# EAGLE board networkLED-v1 (EAGLE 5.07)
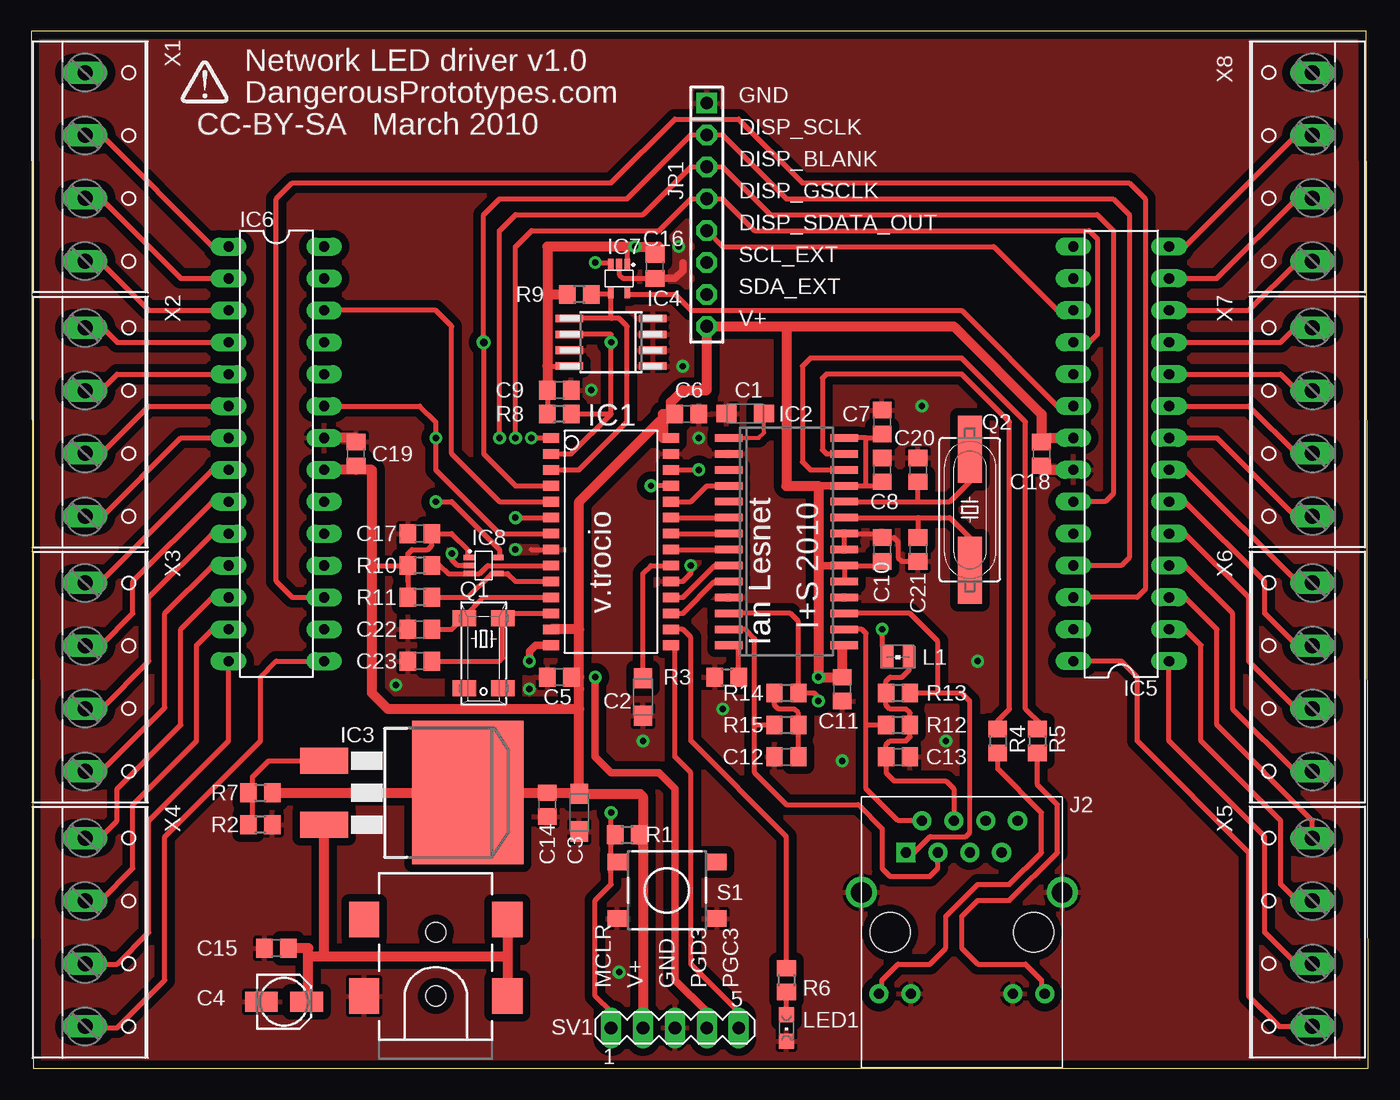
[diagram p0: board, top side]
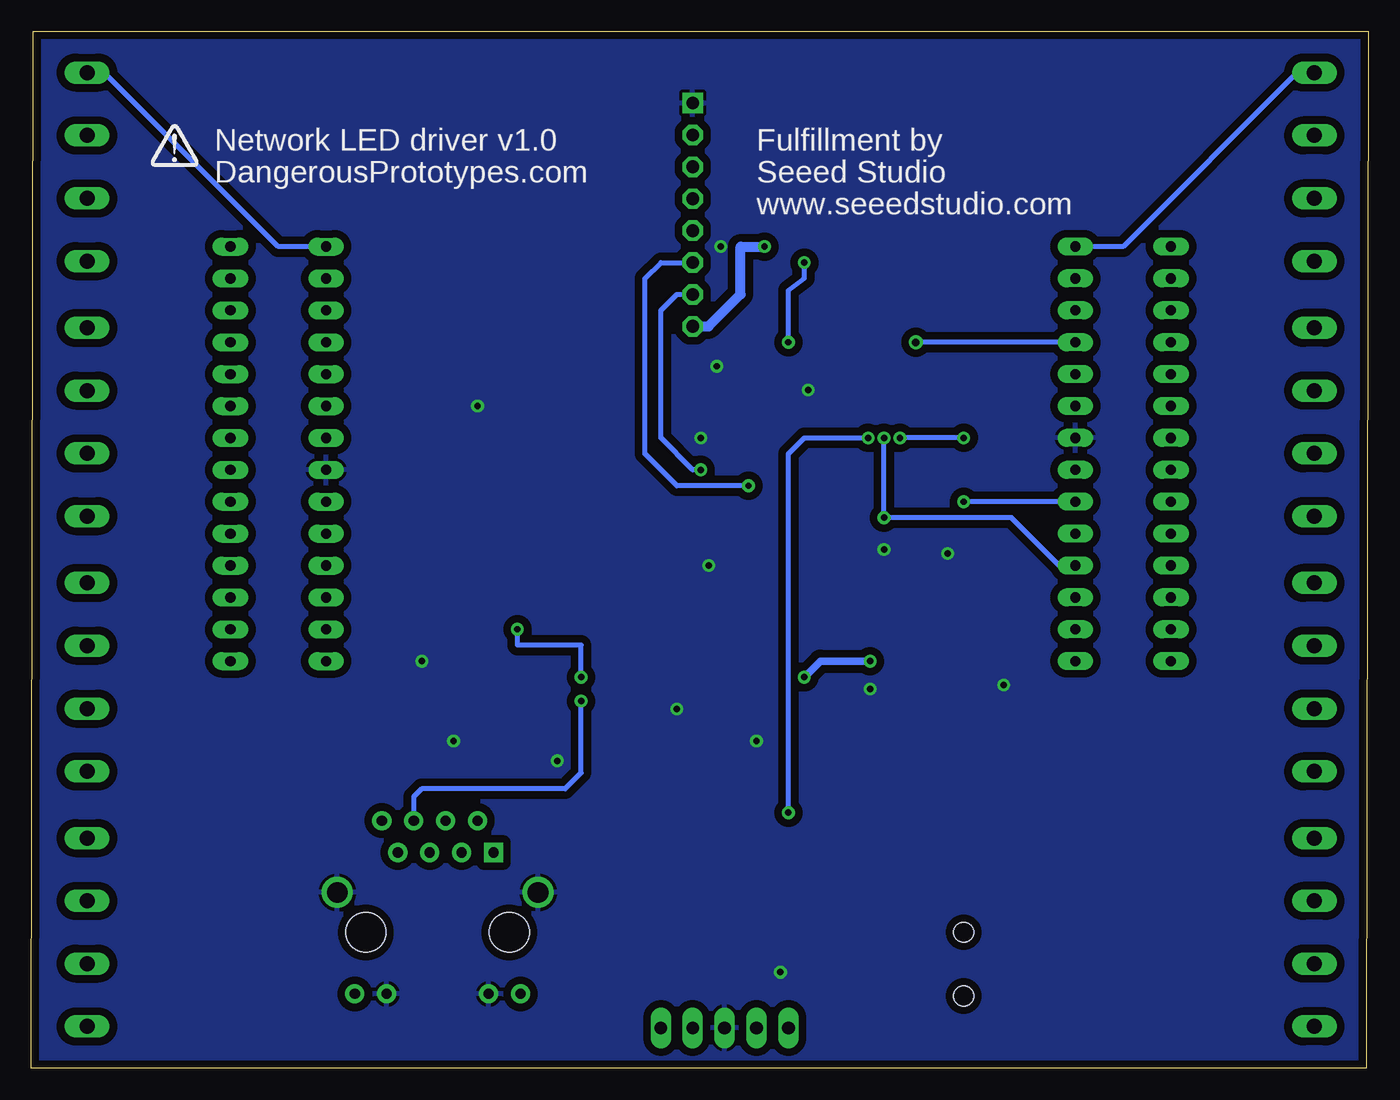
[diagram p1: board, bottom side, seen from below]

Size 106.5 x 82.59 mm. Coordinates in mm from the lower left corner, seen from the top.
Outline: 0.15,0 106.5,0 106.35,82.59 0,82.59 0.15,0
Copper layers (1*16): Top 0.035mm / dielectric 1.5mm / Bottom 0.035mm
Design rules "SparkFun": minimum track width 8mil, minimum drill 20mil, track to track 8mil, track to pad 8mil, pad to pad 8mil, via to via 8mil, smd to smd 8mil, copper to edge 10mil, drill to drill 8mil, minimum pad ring 12mil, minimum via ring 10mil, stop-mask expansion 4mil, vias tented up to drill 25mil, thermal gap 10mil

## Footprints (pad centres in the part's own frame; a part is rotated, then mirrored left to right if it is on the bottom)
SMC_A = smd 1.6 x 1.4: + -1.5,0; - 1.5,0
153CLV-0405 = smd 2.6 x 1.6: + 1.8,0; - -1.8,0
C0805 = smd 1.3 x 1.5: 1 -0.95,0; 2 0.95,0
SO28W = smd 0.762 x 1.27: 1 -8.89,-4.78; 2 -7.62,-4.78; 3 -6.35,-4.78; 4 -5.08,-4.78; 5 -3.81,-4.78; 6 -2.54,-4.78; 7 -1.27,-4.78; 8 0,-4.78; 9 1.27,-4.78; 10 2.54,-4.78; 11 3.81,-4.78; 12 5.08,-4.78; 13 6.35,-4.78; 14 7.62,-4.78; 15 7.62,4.78; 16 6.35,4.78; 17 5.08,4.78; 18 3.81,4.78; 19 2.54,4.78; 20 1.27,4.78; 21 0,4.78; 22 -1.27,4.78; 23 -2.54,4.78; 24 -3.81,4.78; 25 -5.08,4.78; 26 -6.35,4.78; 27 -7.62,4.78; 28 -8.89,4.78
SO28W' = smd 0.6 x 2.2: 1 -8.255,-4.6; 2 -6.985,-4.6; 3 -5.715,-4.6; 4 -4.445,-4.6; 5 -3.175,-4.6; 6 -1.905,-4.6; 7 -0.635,-4.6; 8 0.635,-4.6; 9 1.905,-4.6; 10 3.175,-4.6; 11 4.445,-4.6; 12 5.715,-4.6; 13 6.985,-4.6; 14 8.255,-4.6; 15 8.255,4.6; 16 6.985,4.6; 17 5.715,4.6; 18 4.445,4.6; 19 3.175,4.6; 20 1.905,4.6; 21 0.635,4.6; 22 -0.635,4.6; 23 -1.905,4.6; 24 -3.175,4.6; 25 -4.445,4.6; 26 -5.715,4.6; 27 -6.985,4.6; 28 -8.255,4.6
D2PACK = smd 2.083 x 3.81: 1 -2.54,-8.89; 3 2.54,-8.89 | smd 11.43 x 8.89: 2 0,2.54
SO-08M = smd 0.6 x 2.2: 1 -1.905,-3.33; 2 -0.635,-3.33; 3 0.635,-3.33; 4 1.905,-3.33; 5 1.905,3.33; 6 0.635,3.33; 7 -0.635,3.33; 8 -1.905,3.33
28-DIL-300 = drill 0.813 long: 1 -15.24,-3.81; 2 -12.7,-3.81; 3 -10.16,-3.81; 4 -7.62,-3.81; 5 -5.08,-3.81; 6 -2.54,-3.81; 7 0,-3.81; 8 2.54,-3.81; 9 5.08,-3.81; 10 7.62,-3.81; 11 10.16,-3.81; 12 12.7,-3.81; 13 15.24,-3.81; 14 17.78,-3.81; 15 17.78,3.81; 16 15.24,3.81; 17 12.7,3.81; 18 10.16,3.81; 19 7.62,3.81; 20 5.08,3.81; 21 2.54,3.81; 22 0,3.81; 23 -2.54,3.81; 24 -5.08,3.81; 25 -7.62,3.81; 26 -10.16,3.81; 27 -12.7,3.81; 28 -15.24,3.81
SOT23-5-LT = smd 0.45 x 0.95: P1 0.65,1.1; P2 0,1.1; P3 -0.65,1.1; P4 -0.65,-1.1; P5 0.65,-1.1
POWER_JACK_SMD = smd 2.8 x 2.4: GND 0,-5.7; P$4 6.1,-5.7; VIN0 0,5.7; VIN1 6.1,5.7 | hole 1.6: 0,0; 5.08,0
HR911105A = drill 0.813 pad 1.524 square: 1 4.445,-6.35 | drill 0.813 pad 1.524 round: 2 3.175,-8.89; 3 1.905,-6.35; 4 0.635,-8.89; 5 -0.635,-6.35; 6 -1.905,-8.89; 7 -3.175,-6.35; 8 -4.445,-8.89; 9 6.604,4.902; 10 4.064,4.902; 11 -4.064,4.902; 12 -6.604,4.902 | drill 1.651 pad 2.159 round: 13 8.001,-3.175; 14 -8.001,-3.175 | hole 3.2: 5.715,0; -5.715,0
1X08 = drill 1.016 square: 1 -8.89,0 | drill 1.016 octagon: 2 -6.35,0; 3 -3.81,0; 4 -1.27,0; 5 1.27,0; 6 3.81,0; 7 6.35,0; 8 8.89,0
WE-KI_0805_B = smd 1.02 x 1.78: 1 -0.89,0; 2 0.89,0
LED0805 = smd 1.2 x 1.2: A 0,-1.05; C 0,1.05
MM20SS = smd 1.27 x 1.88: 1 -2.794,-1.524; 2 2.794,-1.524; 3 2.794,1.524; 4 -2.794,1.524
HC49UP = smd 5.334 x 1.93: 1 -4.826,0; 2 4.826,0
R0805 = smd 1.3 x 1.5: 1 -0.95,0; 2 0.95,0
LSH43 = smd 1.55 x 1.3: 1 -3.975,2.25; 2 3.975,2.25; 3 -3.975,-2.25; 4 3.975,-2.25
MA05-1 = drill 1.016 long: 1 -5.08,0; 2 -2.54,0; 3 0,0; 4 2.54,0; 5 5.08,0
W237-4 = drill 1.194 long: 1 -7.5,-1.27; 2 -2.5,-1.27; 3 2.5,-1.27; 4 7.5,-1.27

## Placement (x,y rotation side)
C1  10uF  [SMC_A]  56.87,52.15 180 top
C2  10uF  [SMC_A]  48.73,29.57 270 top
C3  10uF  [SMC_A]  43.65,20.37 270 top
C4  10uF  [153CLV-0405]  20.13,5.3 0 top
C5  0.1uF  [C0805]  42.06,31.16 180 top
C6  0.1uF  [C0805]  52.22,52.12 0 top
C7  0.1uF  [C0805]  67.78,51.48 90 top
C8  0.1uF  [C0805]  67.78,47.67 90 top
C9  0.1uF  [C0805]  42.06,54.02 0 top
C10  0.1uF  [C0805]  67.78,41.32 90 top
C11  0.1uF  [C0805]  64.61,30.21 270 top
C12  0.1uF  [C0805]  60.16,24.81 0 top
C13  0.1uF  [C0805]  69.05,24.81 0 top
C14  0.1uF  [C0805]  41.11,21 270 top
C15  0.1uF  [C0805]  19.52,9.57 180 top
C16  0.1uF  [C0805]  49.68,63.86 270 top
C17  0.1uF  [C0805]  30.95,42.59 180 top
C18  0.1uF  [C0805]  80.48,48.94 270 top
C19  0.1uF  [C0805]  25.87,48.94 90 top
C20  27pf  [C0805]  70.64,47.67 90 top
C21  27pf  [C0805]  70.64,41.32 270 top
C22  27pf  [C0805]  30.95,34.97 180 top
C23  27pf  [C0805]  30.95,32.43 180 top
IC1  [SO28W]  46.19,41.32 270 top
IC2  ENC28J60-SO  [SO28W']  60.16,41.96 270 top
IC3  LM317BD2T  [D2PACK]  32.22,21.95 270 top
IC4  24AA04SM  [SO-08M]  46.19,57.83 90 top
IC5  TLC5940-NT  [28-DIL-300]  86.83,47.67 90 top
IC6  TLC5940-NT  [28-DIL-300]  19.52,50.21 270 top
IC7  MCP4019  [SOT23-5-LT]  46.82,62.91 0 top
IC8  MCP4019  [SOT23-5-LT]  36.03,40.05 90 top
J1  POWER_JACKSMD  [POWER_JACK_SMD]  32.22,5.76 90 top
J2  HR911105A  [HR911105A]  74.13,10.84 180 top
JP1  [1X08]  53.81,67.99 270 top
L1  [WE-KI_0805_B]  69.05,32.75 0 top
LED1  [LED0805]  60.16,3.22 180 top
Q1  32.768khz  [MM20SS]  36.03,33.07 270 top
Q2  25Mhz  [HC49UP]  74.77,44.5 270 top
R1  2K  [R0805]  47.46,18.62 0 top
R2  240R  [R0805]  18.25,21.95 0 top
R3  2K32  [R0805]  55.4,31.16 0 top
R4  390R  [R0805]  76.99,26.08 270 top
R5  390R  [R0805]  80.16,26.08 270 top
R6  390R  [R0805]  60.16,7.03 270 top
R7  390R  [R0805]  18.25,19.41 180 top
R8  390R  [R0805]  42.06,52.12 180 top
R9  390R  [R0805]  43.65,61.64 180 top
R10  390R  [R0805]  30.95,40.05 180 top
R11  390R  [R0805]  30.95,37.51 180 top
R12  49R9 1%  [R0805]  69.05,27.35 0 top
R13  49R9 1%  [R0805]  69.05,29.89 180 top
R14  49R9 1%  [R0805]  60.16,29.89 180 top
R15  49R9 1%  [R0805]  60.16,27.35 0 top
S1  DTSM-6  [LSH43]  50.63,14.17 0 top
SV1  [MA05-1]  51.27,3.22 0 top
U$1  [DP-LOGO-BOTTOM]  93.18,71.8 0 top
U$4  [DP-LOGO]  11.9,76.88 0 top
X1  [W237-4]  5.55,71.8 270 top
X2  [W237-4]  5.55,51.48 270 top
X3  [W237-4]  5.55,31.16 270 top
X4  [W237-4]  5.55,10.84 270 top
X5  [W237-4]  100.8,10.84 90 top
X6  [W237-4]  100.8,31.16 90 top
X7  [W237-4]  100.8,51.48 90 top
X8  [W237-4]  100.8,71.8 90 top

## Library data of the parts
C1-C23 R1-R15 = rcl
IC1 = microchip-pic24
IC2 = microchip-enc28j60
IC3 = v-reg
IC4 = microchip
IC5 IC6 = TLC5490
IC7 IC8 U$4 = dp_devices
J1 = SparkFun
J2 = CONNECTER
JP1 = pinhead-2
L1 = wuerth-elektronik
LED1 = led
Q1 Q2 = crystal
S1 = switch-tact
SV1 = con-lstb
U$1 = DP-logo
X1-X8 = con-wago-500

## Nets
CCT: C13.1 J2.4 L1.2 R12.2 R13.2
DISP_BLANK: IC1.7 IC5.23 IC6.23 JP1.3
DISP_GSCLK: IC1.6 IC5.18 IC6.18 JP1.4
DISP_SCLK: IC1.4 IC5.25 IC6.25 JP1.2
DISP_SDATA: IC1.5 IC6.26
DISP_SDATA_OUT: IC5.17 JP1.5
ETH-CLK: IC1.21 IC2.8
ETH-CS: IC1.18 IC2.9
ETH-INT: IC1.24 IC2.4
ETH-MISO: IC1.23 IC2.6
ETH-MOSI: IC1.22 IC2.7
ETH-RST: IC1.17 IC2.10
GND: C1.- C2.- C3.- C4.- C5.2 C6.2 C7.2 C8.2 C9.2 C10.2 C11.2 C12.1 C13.2 C14.2 C15.2 C16.2 C17.2 C18.2 C19.2 C20.2 C21.2 C22.2 C23.2 IC1.8 IC1.19 IC1.27 IC2.2 IC2.11 IC2.18 IC2.21 IC2.22 IC4.1 IC4.2 IC4.3 IC4.4 IC4.7 IC5.22 IC6.22 IC7.P2 IC8.P2 J1.VIN0 J2.10 J2.11 J2.13 J2.14 JP1.1 LED1.C R3.1 R7.1 S1.3 S1.4 SV1.3
IREF0: IC5.20 IC7.P5
IREF1: IC6.20 IC8.P5
LED: IC1.16 R6.1
LED_LINK: J2.9 R4.2
LED_STATUS: J2.12 R5.2
MCLR: IC1.1 R1.1 S1.1 SV1.1
N$1: C23.1 IC1.12 Q1.4
N$2: IC2.27 R4.1
N$4: IC2.26 R5.1
N$5: C22.1 IC1.11 Q1.1
N$6: C1.+ IC2.1
N$7: IC2.14 R3.2
N$8: C2.+ IC1.20
N$9: C20.1 IC2.24 Q2.1
N$10: LED1.A R6.2
N$12: C21.1 IC2.23 Q2.2
N$14: IC6.28 X1.1
N$15: IC6.1 X1.2
N$16: IC6.2 X1.3
N$17: IC6.3 X1.4
N$18: IC6.4 X2.1
N$19: IC3.1 R2.1 R7.2
N$20: C4.+ C15.1 IC3.3 J1.GND J1.P$4
N$21: IC6.5 X2.2
N$22: C12.2 R14.2 R15.2
N$23: IC6.6 X2.3
N$24: IC6.7 X2.4
N$25: IC6.8 X3.1
N$26: IC6.9 X3.2
N$27: IC6.10 X3.3
N$28: IC6.11 X3.4
N$29: IC6.15 X4.4
N$30: IC6.12 X4.1
N$31: IC6.13 X4.2
N$32: IC6.14 X4.3
N$33: IC5.3 X5.4
N$34: IC5.2 X5.3
N$35: IC5.1 X5.2
N$36: IC5.28 X5.1
N$37: IC5.4 X6.1
N$38: IC5.5 X6.2
N$39: IC5.6 X6.3
N$40: IC5.7 X6.4
N$41: IC5.8 X7.1
N$42: IC5.9 X7.2
N$43: IC5.10 X7.3
N$44: IC5.11 X7.4
N$45: IC5.12 X8.1
N$46: IC5.13 X8.2
N$47: IC5.14 X8.3
N$48: IC5.15 X8.4
N$49: IC5.26 IC6.17
PGC: IC1.15 SV1.5
PGD: IC1.14 SV1.4
RD+: IC2.13 J2.3 R15.1
RD-: IC2.12 J2.6 R14.1
SCL_1: IC1.2 IC4.6 IC7.P3 R8.1
SCL_2: IC1.9 IC8.P3 R10.1
SCL_EXT: IC1.25 JP1.6
SDA_1: IC1.3 IC4.5 IC7.P4 R9.1
SDA_2: IC1.10 IC8.P4 R11.1
SDA_EXT: IC1.26 JP1.7
TD+: IC2.17 J2.1 R13.1
TD-: IC2.16 J2.2 R12.1
V+: C3.+ C5.1 C6.1 C7.1 C8.1 C9.1 C10.1 C11.1 C14.1 C16.1 C17.1 C18.1 C19.1 IC1.13 IC1.28 IC2.15 IC2.19 IC2.20 IC2.25 IC2.28 IC3.2 IC4.8 IC5.21 IC6.21 IC7.P1 IC8.P1 JP1.8 L1.1 R1.2 R2.2 R8.2 R9.2 R10.2 R11.2 SV1.2

## Tracks (layer width: path | path; a pad name or v marks a point on that pad's centre or on a via)
CCT
  Top 0.406: L1.2 69.94,31.73 69.37,31.16 68.41,31.16 68.1,30.85 R13.2 68.1,28.94 68.41,28.62 69.69,28.62 70,28.31 R12.2 70,26.4 69.69,26.08 68.41,26.08 68.1,25.77 C13.1 68.1,23.54 68.73,22.91 72.86,22.91 73.5,22.27 J2.4
DISP_BLANK  (via drill 0.51)
  Top 0.406: IC1.7 37.3,42.59 32.22,47.67 v32.22,50.21 32.22,51.48 30.95,52.75 IC6.23 | IC5.23 85.56,45.13 86.19,45.77 86.19,66.72 84.92,67.99 58.89,67.99 55.08,71.8 JP1.3 52.54,71.8 48.73,67.99 38.57,67.99 37.3,66.72 v37.3,50.21
  Bottom 0.406: v32.22,50.21 v37.3,50.21
DISP_GSCLK  (via drill 0.51)
  Top 0.406: IC5.18 84.29,57.83 84.92,58.47 84.92,66.09 84.29,66.72 57.62,66.72 55.08,69.26 JP1.4 52.54,69.26 50,66.72 39.84,66.72 38.57,65.45 v38.57,50.21 | v38.57,43.86 IC1.6
  Bottom 0.406: v38.57,50.21 v38.57,43.86 28.41,43.86 24.6,40.05 IC6.18
DISP_SCLK  (via drill 0.6)
  Top 0.406: IC1.4 38.57,46.4 36.03,48.94 v36.03,57.83 36.03,67.99 37.3,69.26 47.46,69.26 52.54,74.34 JP1.2 55.08,74.34 60.16,69.26 86.19,69.26 87.47,67.99 87.47,40.69 86.83,40.05 IC5.25
  Bottom 0.406: IC6.25 v36.03,57.83
DISP_SDATA
  Top 0.406: IC1.5 37.3,45.13 33.49,48.94 33.49,59.1 32.22,60.37 IC6.26
DISP_SDATA_OUT
  Top 0.406: IC5.17 81.75,60.37 76.67,65.45 55.08,65.45 JP1.5
ETH-CLK
  Top 0.406: IC1.21 IC2.8
ETH-CS
  Top 0.406: IC1.18 51.91,37.51 54.45,40.05 IC2.9
ETH-INT
  Top 0.406: IC1.24 52.54,45.13 53.81,46.4 IC2.4
ETH-MISO
  Top 0.406: IC1.23 IC2.6
ETH-MOSI
  Top 0.406: IC1.22 IC2.7
ETH-RST
  Top 0.406: IC1.17 51.91,36.24 54.45,38.78 IC2.10
GND  (via drill 0.51)
  Top 0.406: 39.84,41.32 IC1.8 | C18.2 80.48,47.67 | C19.2 25.87,50.21 | IC2.21 IC2.22 67.46,42.59 C10.2 68.73,42.27 69.05,41.96 69.05,40.69 69.36,40.37 C21.2 | IC1.19 51.91,38.78 52.54,39.42 v52.54,40.05 | C16.2 47.14,62.91 46.82,63.23 IC7.P2 | IC8.P2 33.97,40.05 33.49,40.53 v33.49,41
  Top 0.61: C16.2 51.27,62.91 51.91,63.55 51.91,64.18
  Top 0.813: 80.48,47.67 IC5.22 | 25.87,50.21 IC6.22
  other vias: 55.08,28.62 64.61,24.49 48.73,26.08 72.86,26.08 39.68,30.21 75.4,32.43 70.95,52.75 46.82,7.67 51.91,55.93 51.59,65.45 44.6,54.02 53.17,50.21 38.57,41.32 29.04,30.53
  pour Top (isolate 0.61): 0.47,81.96 105.88,81.96 105.88,0.68 0.47,0.68
  pour Bottom (isolate 0.61): 0.47,81.96 105.88,81.96 105.88,0.68 0.47,0.68
IREF0
  Top 0.406: IC7.P5 47.48,61.66 47.46,61.64 51.27,61.64 52.54,60.37 74.13,60.37 81.75,52.75 IC5.20
IREF1  (via drill 0.51)
  Top 0.406: v32.22,45.13 33.49,45.13 37.3,41.32 37.3,40.69 37.28,40.7 IC8.P5
  Bottom 0.406: IC6.20 v32.22,45.13
LED
  Top 0.406: IC1.16 51.91,34.97 52.54,34.34 52.54,26.08 60.16,18.46 R6.1
LED_LINK
  Top 0.406: J2.9 67.78,6.19 67.78,7.03 69.05,8.3 71.59,8.3 72.86,9.57 72.86,12.11 75.4,14.65 77.94,14.65 80.48,17.19 80.48,20.37 76.99,23.86 R4.2
LED_STATUS
  Top 0.406: R5.2 80.16,22.59 81.75,21 81.75,17.19 77.94,13.38 75.4,13.38 74.13,12.11 74.13,9.57 75.4,8.3 79.21,8.3 80.48,7.03 80.48,6.19 J2.12
MCLR  (via drill 0.51)
  Top 0.406: v39.84,50.21 IC1.1 | SV1.1 46.19,4.49 44.92,5.76 44.92,13.38 46.19,14.65 | 46.19,14.65 46.19,17.83 | 46.19,17.83 v46.19,20.37 | S1.1 46.16,16.42 46.19,14.65 | 46.19,17.83 R1.1
  Bottom 0.406: v46.19,20.37 46.19,48.94 44.92,50.21 v39.84,50.21
N$1
  Top 0.406: IC1.12 37.3,36.24 37.55,35.99 Q1.4 37.55,32.68 37.3,32.43 C23.1
N$2
  Top 0.406: 63.65,48.94 IC2.27 63.34,48.94 63.02,49.26 63.02,54.97 63.34,55.29 74.13,55.29 77.94,51.48 77.94,28.62 76.99,27.67 R4.1
N$4
  Top 0.406: 65.24,47.67 IC2.26 62.06,47.67 61.43,48.31 61.43,55.93 62.06,56.56 74.13,56.56 79.21,51.48 79.21,28.62 80.48,27.35 R5.1
N$5
  Top 0.406: Q1.1 34.76,35.61 | Q1.1 34.51,35.99 36.03,37.51 IC1.11 | Q1.1 34.38,35.86 33.49,34.97 C22.1
N$6
  Top 0.305: IC2.1 57.94,50.21 58.37,50.64 C1.+
N$7
  Top 0.406: R3.2 56.35,33.7 IC2.14 55.4,33.7
N$8
  Top 0.406: 51.27,40.05 IC1.20 49.37,40.05 48.73,39.42 C2.+
N$9
  Top 0.406: IC2.24 70.64,45.13 | 70.64,45.13 C20.1 | Q2.1 74.77,46.72 73.18,45.13 70.64,45.13
N$10
  Top 0.406: LED1.A R6.2
N$12
  Top 0.406: IC2.23 70.64,43.86 | 70.64,43.86 C21.1 | Q2.2 74.77,42.27 73.18,43.86 70.64,43.86
N$14
  Bottom 0.406: X1.1 5.67,79.3 19.52,65.45 IC6.28
N$15
  Top 0.406: X1.2 5.59,74.3 14.44,65.45 IC6.1
N$16
  Top 0.406: X1.3 5.51,69.3 11.9,62.91 IC6.2
N$17
  Top 0.406: X1.4 5.43,64.3 9.36,60.37 IC6.3
N$18
  Top 0.406: X2.1 5.67,58.98 6.82,57.83 IC6.4
N$19
  Top 0.406: IC3.1 18.88,24.49 17.61,23.22 17.61,22.27 R2.1 17.61,21.64 17.61,19.41 R7.2
N$20
  Top 0.406: J1.P$4 37.92,8.95 37.94,8.94 | C4.+ 21.93,5.31 22.06,5.44
  Top 0.813: J1.P$4 J1.GND | 22.06,8.94 23.33,8.94 | 23.33,8.94 37.94,8.94 | 22.06,5.44 22.06,8.94 | 22.06,8.94 22.06,9.57 C15.1 | 23.33,8.94 IC3.3
N$21
  Top 0.406: X2.2 5.51,53.98 6.82,55.29 IC6.5
N$22
  Top 0.406: R15.2 61.11,27.03 | C12.2 R15.2 | R15.2 61.11,28.31 60.8,28.62 59.52,28.62 59.21,28.94 R14.2
N$23
  Top 0.406: X2.3 5.59,48.98 9.36,52.75 IC6.6
N$24
  Top 0.406: X2.4 5.67,43.98 11.9,50.21 IC6.7
N$25
  Top 0.406: X3.1 5.43,38.66 14.44,47.67 IC6.8
N$26
  Top 0.406: X3.2 5.51,33.66 8.09,36.24 8.09,38.78 14.44,45.13 IC6.9
N$27
  Top 0.406: X3.3 5.59,28.66 9.36,32.43 9.36,37.51 14.44,42.59 IC6.10
N$28
  Top 0.406: X3.4 5.55,23.66 | 5.55,23.66 5.67,23.66 | IC6.11 14.44,40.05 10.63,36.24 10.63,28.74 5.55,23.66
N$29
  Top 0.406: X4.4 4.28,3.22 6.82,3.22 10.63,7.03 10.63,18.46 18.25,26.08 18.25,31.16 19.52,32.43 IC6.15
N$30
  Top 0.406: IC6.12 14.44,37.51 11.9,34.97 11.9,27.35 6.82,22.27 6.82,19.73 5.43,18.34 X4.1
N$31
  Top 0.406: IC6.13 14.44,34.97 13.17,33.7 13.17,26.08 8.09,21 8.09,15.92 5.55,13.38 4.32,13.38 X4.2
N$32
  Top 0.406: IC6.14 15.71,26.08 9.36,19.73 9.36,10.84 6.82,8.3 4.32,8.3 X4.3
N$33
  Top 0.406: X5.4 102.07,19.73 94.45,27.35 94.45,34.97 91.91,37.51 IC5.3
N$34
  Top 0.406: X5.3 100.84,13.34 99.53,14.65 99.53,19.73 93.18,26.08 93.18,33.7 91.91,34.97 IC5.2
N$35
  Top 0.406: X5.2 100.76,8.34 98.26,10.84 98.26,18.46 90.64,26.08 IC5.1
N$36
  Top 0.406: X5.1 99.41,3.34 96.99,5.76 96.99,17.19 88.1,26.08 88.1,31.16 86.83,32.43 IC5.28
N$37
  Top 0.406: X6.1 100.68,23.66 95.72,28.62 95.72,36.24 91.91,40.05 IC5.4
N$38
  Top 0.406: X6.2 100.76,28.66 96.99,32.43 96.99,37.51 91.91,42.59 IC5.5
N$39
  Top 0.406: X6.3 100.84,33.66 98.26,36.24 98.26,38.78 91.91,45.13 IC5.6
N$40
  Top 0.406: X6.4 100.92,38.66 91.91,47.67 IC5.7
N$41
  Top 0.406: X7.1 100.68,43.98 94.45,50.21 IC5.8
N$42
  Top 0.406: X7.2 100.76,48.98 96.99,52.75 IC5.9
N$43
  Top 0.406: X7.3 100.84,53.98 99.53,55.29 IC5.10
N$44
  Top 0.406: X7.4 100.68,58.98 99.53,57.83 IC5.11
N$45
  Top 0.406: X8.1 100.92,64.3 96.99,60.37 IC5.12
N$46
  Top 0.406: X8.2 100.84,69.3 94.45,62.91 IC5.13
N$47
  Top 0.406: X8.3 100.76,74.3 91.91,65.45 IC5.14
N$48
  Bottom 0.406: X8.4 100.68,79.3 86.83,65.45 IC5.15
N$49
  Top 0.406: IC6.17 20.79,37.51 19.52,38.78 19.52,69.26 20.79,70.53 46.19,70.53 51.27,75.61 56.35,75.61 61.43,70.53 87.47,70.53 88.73,69.26 88.73,38.15 88.1,37.51 IC5.26
PGC
  Top 0.406: IC1.15 51.27,33.7 51.27,24.81 52.54,23.54 52.54,8.3 56.35,4.49 SV1.5
PGD  (via drill 0.51)
  Top 0.61: IC1.14 40.16,33.7 39.68,33.22 v39.68,32.43 | SV1.4 53.81,4.49 51.27,7.03 51.27,22.27 50,23.54 46.19,23.54 44.92,24.81 v44.92,31.16
  Bottom 0.61: v44.92,31.16 43.65,32.43 v39.68,32.43
RD+
  Top 0.406: 57.62,27.35 57.62,23.54 60.16,21 65.88,21 67.78,19.1 67.78,15.92 68.41,15.29 71.59,15.29 72.22,15.92 J2.3 | 57.62,27.35 57.62,34.23 56.89,34.96 55.48,34.96 55.49,34.97 IC2.13 | 57.62,27.35 R15.1
RD-  (via drill 0.51)
  Top 0.406: v62.7,29.26 62.7,29.57 62.38,29.89 R14.1 61.11,35.61 60.48,36.24 IC2.12
  Bottom 0.406: J2.6 76.03,21.64 75.4,22.27 63.97,22.27 62.7,23.54 v62.7,29.26
SCL_1  (via drill 0.51)
  Top 0.406: IC1.2 43.02,48.94 46.19,52.12 | IC4.6 46.19,58.47 v46.19,57.83 46.19,52.12 | 46.19,52.12 R8.1 | IC7.P3 46.17,64.17 46.19,64.18 v44.92,64.18
  Bottom 0.406: v46.19,57.83 46.19,61.96 44.92,62.91 v44.92,64.18
SCL_2
  Top 0.406: IC1.9 36.35,40.05 35.7,39.4 IC8.P3 33.19,39.4 32.54,40.05 R10.1
SCL_EXT  (via drill 0.51)
  Top 0.406: IC1.25 v49.37,46.4
  Bottom 0.406: v49.37,46.4 55.08,46.4 57.62,48.94 57.62,62.91 56.35,64.18 JP1.6
SDA_1
  Top 0.406: IC1.3 43.65,47.67 47.46,51.48 47.46,59.1 46.82,59.74 46.19,59.74 | 46.19,59.74 IC4.5 | 46.19,59.74 46.19,61.64 | 46.19,61.64 R9.1 | 46.19,61.64 46.19,61.8 IC7.P4
SDA_2
  Top 0.406: IC1.10 38.57,38.78 37.95,39.4 IC8.P4 36.65,39.4 34.76,37.51 R11.1
SDA_EXT  (via drill 0.51)
  Top 0.406: IC1.26 v53.17,47.67
  Bottom 0.406: v53.17,47.67 53.81,47.67 56.35,50.21 56.35,60.37 55.08,61.64 JP1.7
TD+
  Top 0.406: IC2.17 70,36.24 72.22,34.02 72.22,29.89 | R13.1 70,29.57 R13.1 72.22,29.89 | J2.1 70.32,17.19 71.59,18.46 74.45,18.46 74.77,18.78 74.77,29.26 74.13,29.89 72.22,29.89
TD-
  Top 0.406: 66.51,27.35 R12.1 | J2.2 69.05,19.73 66.51,22.27 66.51,27.35 | 66.51,27.35 66.51,34.65 66.19,34.97 IC2.16
V+  (via drill 0.51)
  Top 0.406: IC2.19 64.61,38.78 64.76,38.94 IC2.20 67.46,40.05 C10.1 | 65.24,33.7 IC2.15 64.61,33.55 | 51.27,50.21 IC1.28 50.32,50.23 | R8.2 41.11,52.75 C9.1 | 80.48,50.21 C18.1 | 25.87,47.67 C19.1 | 50.32,51.8 C6.1 50.32,52.12 | 50.32,50.85 50.32,50.84 | L1.1 68.16,33.32 67.78,33.7 v67.78,34.97 | C11.1 | IC2.25 66.51,46.4 | 66.51,46.4 66.51,50.21 | 66.51,50.21 IC2.28 | C8.1 67.78,46.4 66.51,46.4 | C7.1 67.78,50.21 66.51,50.21 | 50,65.45 C16.1 | IC8.P1 34.74,40.7 34.74,41.34 33.49,42.59 C17.1 31.9,41.64 31.58,41.32 30.31,41.32 30,41 30,40.37 R10.2 30,38.78 R10.2 | 43.65,30.21 C5.1 | R11.2 30,38.78 R10.2 | 41.11,55.93 IC4.8 | 27.14,40.05 R10.2 | 48.73,17.83 R1.2 | 47.46,65.45 47.46,64.03 IC7.P1 47.48,65.44 47.46,65.45
  Top 0.61: 62.7,40.05 IC2.20 | 62.7,46.4 IC2.25
  Top 0.813: 43.65,34.97 IC1.13 | C9.1 41.11,55.93 41.11,61.64 | IC5.21 80.48,50.21 80.48,52.12 73.5,59.1 60.16,59.1 | 50.32,51.48 50.32,51.8 50.32,52.12 50.95,52.12 | 50.32,51.48 50.32,50.85 | 50.32,50.84 50.32,50.23 | C11.1 64.61,33.55 | C11.1 v62.7,31.16 62.7,40.05 62.7,46.4 60.16,46.4 60.16,59.1 | v48.09,65.45 50,65.45 | 41.11,61.64 41.11,65.45 v48.09,65.45 | 43.65,31.16 43.65,30.21 43.65,28.62 | 43.65,31.16 43.65,34.97 | 50.95,52.12 50.95,53.07 51.91,54.02 53.81,54.02 JP1.8 60.16,59.1 | 41.11,61.64 R9.2 | 50.32,52.12 50.95,52.12 | 43.65,34.97 43.65,45.13 50,51.48 50.32,51.48 | R2.2 IC3.2 C14.1 43.42,21.95 C3.+ | C3.+ 43.56,22.18 43.65,21.95 43.65,28.62 | 43.65,31.16 C5.1 | IC6.21 25.87,47.67 27.14,47.67 27.14,40.05 27.14,29.89 28.41,28.62 43.65,28.62 | C3.+ 48.5,21.87 48.73,21.64 48.73,17.83 SV1.2 | v48.09,65.45 47.46,65.45
  Bottom 0.406: v67.78,34.97 67.78,33.7 62.7,33.7 v62.7,31.16
  Bottom 0.813: v48.09,65.45 50,65.45 50,61.64 52.54,59.1 JP1.8

## Text on the board
tPlace: v.trocio | I+S 2010 | Ian Lesnet | Ian Lesnet
tNames: Network LED driver v1.0 | DangerousPrototypes.com | GND | CC-BY-SA | March 2010 | DISP_SCLK | DISP_BLANK | DISP_GSCLK | DISP_SDATA_OUT | SCL_EXT | SDA_EXT | V+ | MCLR | V+ | GND | PGD3 | PGC3
bNames: Fulfillment by | Network LED driver v1.0 | Seeed Studio | DangerousPrototypes.com | www.seeedstudio.com